# Altium PCB 示波器上层板最终实物版图.PcbDoc
Units mil, origin at the board's own origin, x right, y up, seen from the top; angles counter-clockwise.
Board outline 17265 x 9440 mil, 2 copper layers (Top Layer, Bottom Layer); 24 components, 122 nets, 277 pads, 0 vias.
Unrouted connection lines stored in the file: 22.
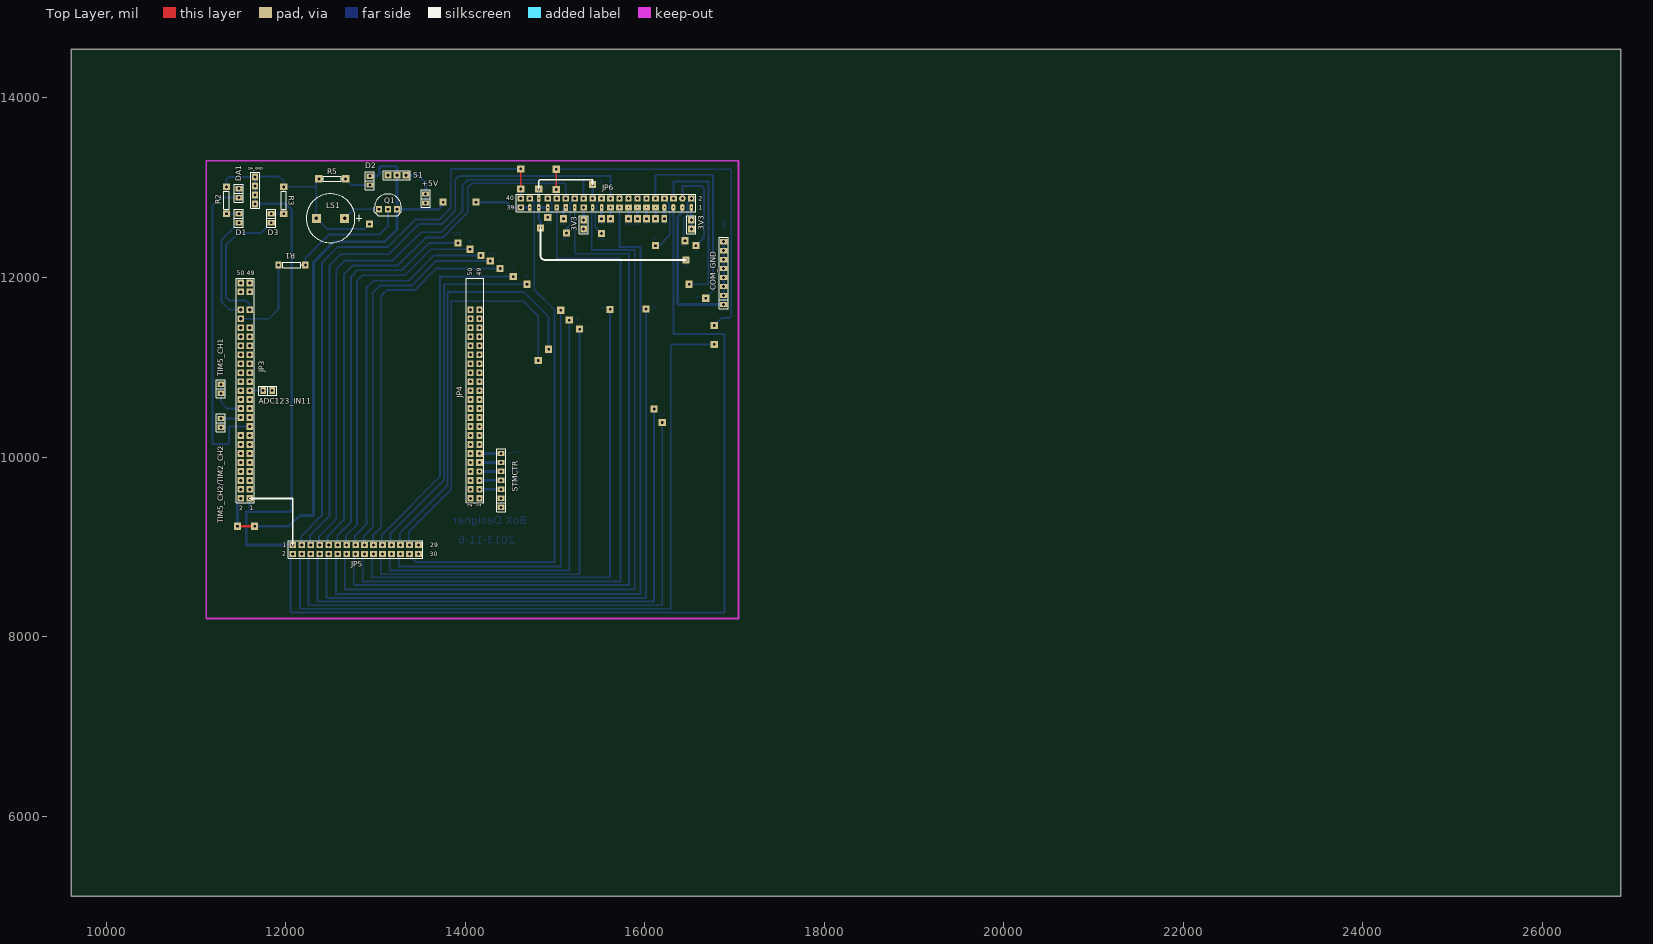
[diagram p0: Top Layer view]
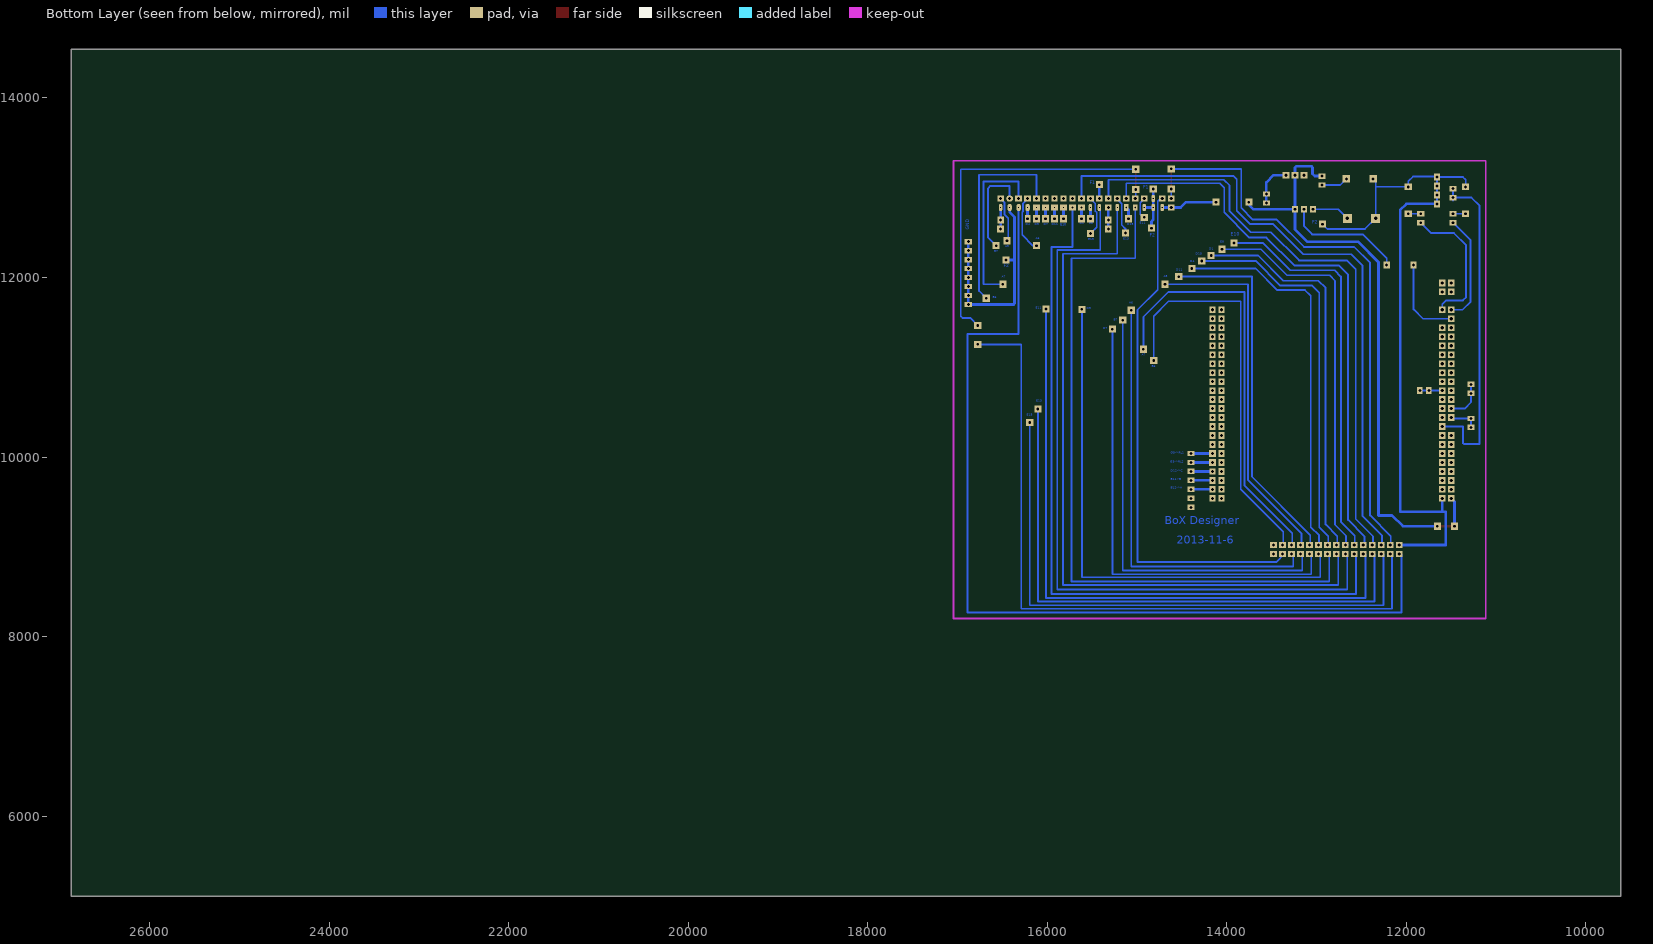
[diagram p1: Bottom Layer view, seen from below]

## Layer stack, top to bottom
Top Layer: signal copper 1.4
Dielectric: dielectric 12.6, FR-4, Dk 4.8
Bottom Layer: signal copper 1.4

## Board outline
9610,14545 9610,5105 26875,5105 26875,14540

## Design rules (kind name [scope] priority, off if disabled: settings)
Clearance [All] p1: gap=10
PolygonConnect [All] p1: connectstyle=Relief reliefconductorwidth=10 reliefentries=4 polygonreliefangle="90 Angle"
RoutingVias [All] p1: holewidth=28 width=50 viastyle="Through Hole" minholewidth=28 minwidth=50 maxholewidth=28 maxwidth=50
SilkscreenOverComponentPads [All] p1: minsilkscreentomaskgap=10
SolderMaskExpansion [All] p1: expansion=4
TestPointUsage [All] p1: valid=0 allowmultiple=FALSE
Testpoint [All] p1: side=15 testpointundercomponent=TRUE minsize=40 maxsize=100 preferedsize=60 minholesize=0 maxholesize=40 preferedholesize=32 testpointgrid=1 style=1023 order=0123456789
Width [All] p1: maxlimit=30 minlimit=10 preferedwidth=10 toplayer_prefwidth=20 bottomlayer_prefwidth=20 minimp=50.000000 maximp=50.000000 favimp=50.000000
23 further rules are at their usual default settings.

## Components (designator, comment, footprint, x,y, rotation, side; value= is the part's Value field where it differs from the comment)
3V3 "Comment" HDR1X2#1 15320,12540 r90 top
3V3 "Comment" HDR1X2#2 16520,12540 r90 top
+5V "" SIP2 13560,12880 r90 top
ADC123_IN11 "" SIP2 11800,10740 r180 top
COM_GND "" SIP8 16880,11700 r90 top
D1 "LED" SIP2 11480,12660 r270 top
D2 "LED" SIP2 12940,13080 r90 top
D3 "LED" SIP2 11840,12660 r270 top
DA1 "" SIP2 11480,12940 r90 top (schematic designator DAC_OUT1)
DA_GND "" HDR1X4 11660,12820 r90 top (schematic designator DAC2_GND)
JP3 "HEADER 25X2" HDR2X25#1 11600,9540 r90 top
JP4 "HEADER 25X2" HDR2X25#2 14160,9540 r90 top
JP5 "HEADER 15X2" HDR2X15 12080,9020 r0 top
JP6 "LCD" HDR2X20 16520,12780 r180 top
LS1 "SPEAKER" BELL 12500,12660 r0 top
Q1 "NPN" TL431 13140,12900 r0 top
R1 "Res2" AXIAL0.3 12070,12140 r0 top
R2 "Res2" AXIAL0.3 11340,12860 r270 top
R3 "Res2" AXIAL0.3 11980,12860 r270 top
R5 "Res2" AXIAL-0.3 12520,13100 r0 top
S1 "SW-SPST" HDR1X3 13340,13140 r180 top
STMCTR "" SIP7 14400,9440 r90 top
TIM5_CH1 "" SIP2 11280,10760 r90 top
TIM5_CH2/TIM2_CH2 "" SIP2 11280,10380 r90 top

## Footprints (in the part's own frame and the unit in brackets; to place one, negate y for a bottom-side part, rotate by r counter-clockwise, add the part's x,y. Pads: shape width x height; smd on the part's side, far side on the other; paste and mask are expansions set on the pad)
AXIAL0.3 [mil]
  rect 70x80 hole 32: 1(-150,0) 2(150,0)
  silkscreen extent -109,-30 109,30
AXIAL-0.3 [mil] "Resistor; 2 Leads"
  rect 80x80 hole 33.46: 1(-150,0) 2(150,0)
  silkscreen extent -109,-30 109,30
BELL [mil]
  rect 100x100 hole 40: 1(158,0) 2(-158,0)
  silkscreen extent -271,-272 348,272
HDR1X2#1 [mil] "Connector; Header; 2 Position"
  rect 75x70 hole 35.43: 1(0,0) 2(100,0)
  silkscreen extent -50,-50 150,50
HDR1X2#2 [mil] "Connector; Header; 2 Position"
  rect 80x80 hole 35.43: 1(0,0)
  rect 75x70 hole 35.43: 2(100,0)
  silkscreen extent -50,-50 150,50
HDR1X3 [mil] "Connector; Header; 3 Position"
  rect 75x70 hole 35.43: 1(0,0) 2(100,0) 3(200,0)
  silkscreen extent -50,-50 250,50
HDR1X4 [mil] "Connector; Header; 4 Position"
  rect 75x70 hole 35.43: 1(0,0) 2(100,0) 3(200,0) 4(300,0)
  silkscreen extent -50,-50 350,50
HDR2X15 [mil] "Connector; Header; 15x2 Position"
  rect 75x70 hole 35.43: 1(0,0) 2(0,-100) 3(100,0) 4(100,-100) 5(200,0) 6(200,-100) 7(300,0) 8(300,-100) 9(400,0) 10(400,-100) 11(500,0) 12(500,-100) 13(600,0) 14(600,-100) 15(700,0) 16(700,-100) 17(800,0) 18(800,-100) 19(900,0) 20(900,-100) 21(1000,0) 22(1000,-100) 23(1100,0) 24(1100,-100) 25(1200,0) 26(1200,-100) 27(1300,0) 28(1300,-100) 29(1400,0) 30(1400,-100)
  silkscreen extent -50,-150 1450,50
HDR2X20 [mil] "Connector; Header; 20x2 Position"
  oval 40x80 hole 10: 1(0,0) 21(1000,0) 23(1100,0) 27(1300,0) 33(1600,0) 35(1700,0) 36(1700,-100) 37(1800,0)
  rect 75x70 hole 35.43: 2(0,-100) 6(200,-100) 8(300,-100) 10(400,-100) 20(900,-100) 22(1000,-100) 24(1100,-100) 25(1200,0) 26(1200,-100) 28(1300,-100) 30(1400,-100) 32(1500,-100) 34(1600,-100) 38(1800,-100) 39(1900,0) 40(1900,-100)
  oval 50x80 hole 10: 3(100,0) 5(200,0)
  oval 75x70 hole 35.43: 4(100,-100)
  oval 50x80 hole 10.43: 7(300,0)
  rect 75x70 hole 10: 9(400,0) 11(500,0) 13(600,0) 15(700,0)
  oval 0x80 all layers, no hole: 12(500,-100) 14(600,-100) 16(700,-100) 18(800,-100)
  rect 75x70 hole 20: 17(800,0)
  rect 80x70 hole 20: 19(900,0)
  rect 50x80 hole 20: 29(1400,0)
  rect 50x70 hole 20: 31(1500,0)
  silkscreen extent -50,-150 1950,50
HDR2X25#1 [mil] "Connector; Header; 25x2 Position"
  rect 75x70 hole 35.43: 1(0,0) 2(0,100) 3(100,0) 4(100,100) 5(200,0) 6(200,100) 7(300,0) 8(300,100) 9(400,0) 10(400,100) 11(500,0) 12(500,100) 13(600,0) 14(600,100) 15(700,0) 16(700,100) 17(800,0) 19(900,0) 20(900,100) 21(1000,0) 22(1000,100) 23(1100,0) 24(1100,100) 25(1200,0) 26(1200,100) 27(1300,0) 28(1300,100) 29(1400,0) 30(1400,100) 31(1500,0) 32(1500,100) 33(1600,0) 34(1600,100) 35(1700,0) 36(1700,100) 37(1800,0) 38(1800,100) 39(1900,0) 40(1900,100) 42(2000,100) 43(2100,0) 44(2100,100) 47(2300,0) 48(2300,100) 49(2400,0) 50(2400,100)
  round 0 all layers, no hole: 18(800,100)
  oval 0x80 all layers, no hole: 41(2000,0) 46(2200,100)
  rect 0x70 all layers, no hole: 45(2200,0)
  silkscreen extent -50,-50 2450,150
HDR2X25#2 [mil] "Connector; Header; 25x2 Position"
  rect 75x70 hole 35.43: 1(0,0) 2(0,100) 3(100,0) 4(100,100) 5(200,0) 6(200,100) 8(300,100) 10(400,100) 12(500,100) 13(600,0) 14(600,100) 15(700,0) 16(700,100) 17(800,0) 18(800,100) 19(900,0) 20(900,100) 21(1000,0) 22(1000,100) 23(1100,0) 24(1100,100) 25(1200,0) 26(1200,100) 27(1300,0) 28(1300,100) 29(1400,0) 30(1400,100) 31(1500,0) 32(1500,100) 33(1600,0) 34(1600,100) 35(1700,0) 36(1700,100) 37(1800,0) 38(1800,100) 39(1900,0) 40(1900,100) 41(2000,0) 42(2000,100) 43(2100,0) 44(2100,100)
  round 0 all layers, no hole: 7(300,0) 47(2300,0) 48(2300,100) 49(2400,0) 50(2400,100)
  rect 80x80 hole 35.43: 9(400,0) 11(500,0)
  oval 0x80 all layers, no hole: 45(2200,0) 46(2200,100)
  silkscreen extent -50,-50 2450,150
SIP2 [mil]
  rect 60x80 hole 32: 1(-50,0) 2(50,0)
  silkscreen extent -100,-50 100,50
SIP7 [mil]
  rect 60x80 hole 32: 1(0,0) 2(100,0) 3(200,0) 4(300,0) 5(400,0) 6(500,0) 7(600,0)
  silkscreen extent -50,-50 650,50
SIP8 [mil]
  rect 60x80 hole 32: 1(0,0) 2(100,0) 3(200,0) 4(300,0) 5(400,0) 6(500,0) 7(600,0) 8(700,0)
  silkscreen extent -50,-50 750,50
TL431 [mil]
  rect 70x70 hole 31.5: 1(-100,-140) 2(0,-140) 3(100,-140)
  silkscreen extent -150,-210 150,30

## Part data
+5V: library part "HEADER 3"
ADC123_IN11 DA_GND TIM5_CH1 TIM5_CH2/TIM2_CH2: library part CON2, "Connector"
COM_GND: library part CON8, "Connector"
DA1: library part CON4, "Connector"
JP6: library part "HEADER 20X2"
Q1: "NPN Transistor"
R1 R2 R3 R5: "Resistor"
STMCTR: library part CON7, "Connector"

## Free pads (board coordinates)
  rect 80x80 hole 30: 0(11465,9230) 0(14120,12840) 1(11655,9230) 1(13755,12840) 2(16680,11770) 3(14815,11075) 4(16495,11925) 5(14930,11200) 6(12935,12595) 7(14840,12550) 8(16105,10535) 9(16460,12195) 10(16195,10385) 12(16775,11255) 14(14620,13210) 15(14620,12985) 16(13920,12385) 17(14055,12315) 18(14175,12245) 19(14280,12185) 20(14390,12100) 21(15820,12655) 22(15520,12655) 23(15620,12655) 24(15095,12655) 26(14535,12010) 27(15920,12655) 28(14690,11925) 29(16450,12410) 30(15065,11635) 31(16120,12355) 32(15160,11525) 33(16570,12355) 34(15275,11425) 35(16020,12655) 36(15615,11645) 37(16120,12655) 38(16015,11650) 39(14920,12670) 41(15130,12495) 42(15520,12490) 43(16775,11465) 44(15015,13205) 45(15015,12980) 46(15420,13035) 47(14820,12985)
  rect 70x70 hole 30: 0(15720,12880) 1(15820,12880) 2(15920,12880) 3(16020,12880) 4(14160,9840)
  rect 60x80 hole 30: 25(16220,12655)

## Nets (pads, with @x,y where several pads share a name; then routed paths per layer and width w, separated by ;. In a path a pad name is that pad's centre, name@x,y a point inside that pad or via, vN(x,y) a via of type N, cw(c..) or ccw(c..) an arc to the next point about the centre after c; other vN are vias at no path point)
3V3: 3V3.1 3V3.2 JP6.1 JP6.25 | length 500
  Bottom Layer w30: 3V3.1@15320,12540 15320,12640 JP6.25 ; 3V3.1@16520,12520 16520,12620 JP6.1
4051A: 
4051B: JP4.8
4051C: 
+5V: +5V.1 +5V.2 S1.1 | length 483.1
  Bottom Layer w30: S1.1 13480,13140 13560,13060 +5V.2 +5V.1
+5VDD: D2.2 JP3.2 JP6.37 JP6.39 pad.0@11465,9230 pad.0@14120,12840 pad.1@11655,9230 pad.1@13755,12840 Q1.3 S1.2 | length 7393.7
  Top Layer w30: pad.0@11465,9230 pad.1@11655,9230
  Bottom Layer w30: pad.0@11465,9230 11465,9505 JP3.2 ; pad.1@11655,9230 12040,9230 12160,9350 12310,9350 12310,12170 12540,12400 13105,12400 13240,12535 Q1.3 ; D2.2 13020,13130 13045,13155 13045,13225 13060,13240 13225,13240 13240,13225 S1.2 Q1.3 ; pad.1@13755,12840 13755,12810 13705,12760 Q1.3 ; pad.0@14120,12840 14455,12840 14515,12780 JP6.39 JP6.37
A0: JP3.22 TIM5_CH1.1 TIM5_CH1.2 | length 449
  Bottom Layer w20: TIM5_CH1.2 TIM5_CH1.1 11280,10610 11350,10540 JP3.22
A1: JP3.20 TIM5_CH2/TIM2_CH2.1 TIM5_CH2/TIM2_CH2.2 | length 324.1
  Bottom Layer w20: TIM5_CH2/TIM2_CH2.1 TIM5_CH2/TIM2_CH2.2 11490,10430 JP3.20
A2: JP3.19
A3: JP3.18
A4: DA1.1 DA1.2 JP3.17 | length 3726.4
  Bottom Layer w20: 11480,12855 DA1.1 ; DA1.2 DA1.1 ; JP3.17 11370,10340 11370,10155 11360,10145 11185,10145 11185,12800 11275,12890 DA1.1
A5: JP5.23 JP6.2 pad.28 pad.29 | length 4592
  Bottom Layer w20: JP5.23 13170,9030 13170,9150 13765,9745 13765,11925 pad.28 ; pad.29 16435,12425 16435,12660 16477.5,12702.5 16477.5,12837.5 JP6.2
A6: JP5.26 JP6.8 pad.30 pad.31 | length 5439.6
  Bottom Layer w20: JP5.26@13260,8920 13260,8780 15065,8780 pad.30 ; pad.31 16160,12355 16280,12475 16280,12725 16270,12735 16270,12825 16220,12875 JP6.8
A7: JP5.25 JP6.6 pad.4@16495,11925 pad.5 | length 6584.7
  Bottom Layer w20: JP5.25 13272.5,9027.5 13272.5,9152.5 13805,9685 13805,11840 14650,11840 14930,11560 pad.5 ; JP6.6 16320,13070 16710,13070 16710,11925 pad.4@16495,11925
A8: JP4.19
A9: JP4.20
A10: JP4.21
A11: JP4.22
A12: JP4.23
A13: JP4.24
A14: JP4.25
A15: JP4.26
B0: JP3.14
B1: JP3.13
B3: JP4.40
B4: JP4.41
B5: JP4.42
B6: JP5.27 JP6.10 pad.2@16680,11770 pad.3@14815,11075 | length 6760.3
  Bottom Layer w20: JP5.27 13372.5,9027.5 13372.5,9167.5 13845,9640 13845,11735 14650,11735 14815,11570 pad.3@14815,11075 ; JP6.10 16120,13145 16760,13145 16760,11850 pad.2@16680,11770
B7: JP5.24 JP6.4 pad.32 pad.33 | length 6042.6
  Bottom Layer w20: JP5.24@13160,8920 13160,8735 15160,8735 pad.32 ; JP6.4 16420,13020 16635,13020 16660,12995 16660,12445 pad.33
B8: JP4.43
B9: JP4.44
B10: JP3.5
B11: JP3.4
B12: JP4.3 STMCTR.3 | length 240
  Bottom Layer w30: JP4.3 STMCTR.3
B13: JP4.4
B14: JP4.5 STMCTR.4 | length 240
  Bottom Layer w30: JP4.5 STMCTR.4
B15: JP4.6
C0: JP3.26
C1: ADC123_IN11.1 ADC123_IN11.2 JP3.25 | length 250
  Bottom Layer w20: JP3.25 ADC123_IN11.2 ADC123_IN11.1
C2: JP5.30
C3: JP3.24
C4: JP3.16
C5: JP3.15
C6: JP4.15
C7: JP4.16
C8: JP4.17
C9: JP4.18
C10: JP4.27
C11: JP4.28
C12: JP4.29
C13: JP3.40
C14: JP3.39
C15: JP3.38
D0: JP5.16 JP6.27 | length 8220
  Bottom Layer w20: JP5.16@12760,8920 12760,8575 15825,8575 15825,12265 15220,12265 JP6.27
D1: JP5.15 JP6.19 pad.18 pad.23 | length 4479.2
  Bottom Layer w20: JP5.15@12755,9025 JP5.15@12760,9020 ; JP5.15 12770,9030 12770,9120 12900,9250 12900,11885 12980,11965 13370,11965 13650,12245 pad.18
  Bottom Layer w30: pad.23 JP6.19
D2: JP4.30
D3: JP4.31
D4: JP5.19 JP6.7 pad.20 pad.25 | length 4399.8
  Bottom Layer w20: JP5.19@12955,9025 JP5.19@12960,9020 ; JP5.19 12972.5,9027.5 12972.5,9127.5 13065,9220 13065,11795 13130,11860 13440,11860 13680,12100 pad.20
  Bottom Layer w30: pad.25 JP6.7
D5: JP5.20 JP6.9 pad.36 pad.37 | length 6025
  Bottom Layer w20: JP5.20@12960,8920 12960,8660 15615,8660 pad.36
  Bottom Layer w30: pad.37 JP6.9
D6: JP4.32
D7: JP5.22 JP6.11 pad.34 pad.35 | length 5295
  Bottom Layer w20: JP5.22@13060,8920 13060,8695 15275,8695 pad.34
  Bottom Layer w30: pad.35 JP6.11
D8: JP5.5 JP6.20 | length 7215.4
  Bottom Layer w20: JP5.5@12255,9025 JP5.5@12260,9020 ; JP5.5 12272.5,9027.5 12272.5,9127.5 12490,9345 12490,12135 12615,12260 13150,12260 13485,12595 13740,12595 13890,12745 13890,13100 13895,13100 13925,13130 15620,13130 JP6.20
D9: JP5.4 JP6.32 pad.12 pad.43 pad.44 pad.45 | length 12315.6
  Top Layer w20: pad.45 pad.44
  Bottom Layer w20: JP5.4@12160,8920 12160,8310 16290,8310 16290,11255 pad.12 ; pad.45 15015,12885 JP6.32 ; pad.44 16965,13205 16965,11570 16945,11550 16860,11550 pad.43
D10: JP5.3 JP6.40 pad.14 pad.15 | length 6489.2
  Top Layer w20: pad.15 pad.14
  Bottom Layer w20: JP5.3@12155,9025 JP5.3@12160,9020 ; JP5.3 12175,9025 12175,9120 12405,9350 12405,12165 12580,12340 13140,12340 13445,12645 13710,12645 ; 13715,12650 13710,12645 ; JP6.40 pad.15 ; pad.14 13840,13210 13840,12775 13710,12645
D11: JP5.21 JP6.13 pad.26 pad.27 | length 4203.4
  Bottom Layer w20: JP5.21 13070,9030 13070,9130 13720,9780 13720,12010 pad.26
  Bottom Layer w30: pad.27 JP6.13
D12: JP4.7 pad.4@14160,9840 STMCTR.5 | length 240
  Bottom Layer w30: JP4.7 STMCTR.5
D13: JP5.28 JP6.38 | length 5847.9
  Bottom Layer w20: JP5.28@13360,8920 13450,8830 14995,8830 14995,11640 14770,11865 14770,12850 14740,12880 JP6.38
D14: JP5.18 JP6.31 | length 8050
  Bottom Layer w20: JP5.18@12860,8920 12860,8615 15730,8615 15730,12215 15020,12215 JP6.31
D15: JP5.17 JP6.29 pad.19 pad.24 | length 4490.4
  Bottom Layer w20: JP5.17@12855,9025 JP5.17@12860,9020 ; JP5.17 12870,9030 12870,9120 12970,9220 12970,11830 13050,11910 13405,11910 13680,12185 pad.19 ; pad.24 pad.24@15120,12680
  Bottom Layer w30: pad.24 15095,12755 JP6.29
E0: JP4.45
E1: JP5.2 JP6.5 | length 10567.1
  Bottom Layer w20: JP5.2@12060,8920 12055,8915 12055,8270 16890,8270 16890,11370 16320,11370 JP6.5
E2: JP4.46
E3: D1.2 JP3.44 | length 1213.1
  Bottom Layer w20: D1.2 11285,12415 11285,11730 11375,11640 JP3.44
E4: D3.2 JP3.43 | length 1546.7
  Bottom Layer w20: JP3.43 11600,11700 11555,11745 11370,11745 11335,11780 11335,12360 11470,12495 11725,12495 D3.2
E5: JP3.42 R1.1 | length 958.5
  Bottom Layer w20: JP3.42 11815,11540 11920,11645 R1.1
E6: JP3.41
E7: JP5.14 JP6.23 | length 8364.1
  Bottom Layer w20: JP5.14@12660,8920 12660,8525 15890,8525 15890,12305 15410,12305 15410,12770 JP6.23
E8: JP5.13 JP6.21 pad.17 pad.22 | length 4535.9
  Bottom Layer w20: JP5.13@12655,9025 JP5.13@12660,9020 ; JP5.13 12672.5,9027.5 12672.5,9122.5 12795,9245 12795,11965 12855,12025 13330,12025 13620,12315 pad.17
  Bottom Layer w30: pad.22 JP6.21
E9: JP5.12 JP6.17 | length 8380
  Bottom Layer w20: JP5.12@12560,8920 12560,8475 15955,8475 15955,12340 15720,12340 JP6.17
E10: JP5.11 JP6.15 pad.16 pad.21 | length 4533.7
  Bottom Layer w20: JP5.11@12555,9025 JP5.11@12560,9020 ; JP5.11 12575,9025 12575,9125 12730,9280 12730,12010 12800,12080 13295,12080 13600,12385 pad.16
  Bottom Layer w30: pad.21 JP6.15
E11: JP5.10 JP6.34 pad.38 pad.39 | length 7525.2
  Bottom Layer w20: JP5.10@12460,8920 12455,8915 12455,8430 16015,8430 pad.38 ; pad.39 14930,12670 14965,12705 14965,12835 JP6.34
E12: JP5.9 JP6.30 | length 6321.4
  Bottom Layer w20: JP5.9@12455,9025 JP5.9@12460,9020 ; JP5.9 12467.5,9032.5 12467.5,9117.5 12650,9300 12650,12030 12755,12135 13250,12135 13560,12445 13750,12445 14030,12725 14030,13000 14080,13050 15120,13050 JP6.30
E13: JP5.8 JP6.28 pad.8 pad.41 | length 6849.4
  Bottom Layer w20: JP5.8@12360,8920 12355,8915 12355,8390 16105,8390 pad.8 ; pad.41 15130,12545 15170,12585 15170,12821.72 15220,12871.72 JP6.28
E14: JP5.7 JP6.26 | length 6706.1
  Bottom Layer w20: JP5.7@12355,9025 JP5.7@12360,9020 ; JP5.7 12372.5,9027.5 12372.5,9117.5 12565,9310 12565,12090 12665,12190 13195,12190 13510,12505 13735,12505 13970,12740 13970,13025 14035,13090 15320,13090 JP6.26
E15: JP5.6 JP6.22 pad.10 pad.42 | length 6995.1
  Bottom Layer w20: JP5.6@12260,8920 12255,8915 12255,8350 16195,8350 pad.10 ; pad.42 15450,12560 15450,12725 15465,12740 15465,12824.22 15520,12879.22 JP6.22
F0: JP3.37
F1: JP3.36
F2: JP3.35
F3: JP3.34
F4: JP3.33
F5: JP3.32
F6: JP3.31
F7: JP3.30
F8: JP3.29
F9: JP3.28
F10: JP3.27
F11: JP3.12
F12: JP3.11
F13: JP3.10
F14: JP3.9
F15: JP3.8
G0: JP3.7
G4: JP4.9 STMCTR.6 | length 240
  Bottom Layer w30: JP4.9 STMCTR.6
G5: JP4.11 STMCTR.7 | length 240
  Bottom Layer w30: JP4.11 STMCTR.7
G6: JP4.12
G7: JP4.13
G8: JP4.14
G9: JP4.33
G10: JP4.34
G11: JP4.35
G12: JP4.36
G13: JP4.37
G14: JP4.38
G15: JP4.39
GND: COM_GND.1 COM_GND.2 COM_GND.3 COM_GND.4 COM_GND.5 COM_GND.6 COM_GND.7 COM_GND.8 DA_GND.1 DA_GND.2 DA_GND.3 DA_GND.4 JP3.1 JP5.1 JP6.3 JP6.24 JP6.33 JP6.35 JP6.36 LS1.2 pad.6 pad.7 pad.9 pad.46 pad.47 R2.1 R3.1 R5.1 | length 11084.2
  Bottom Layer w20: R2.1 11340,13090 11370,13120 DA_GND.4 ; DA_GND.1 DA_GND.2 DA_GND.3 DA_GND.4 ; R5.1 12342,13072 12342,13005 ; pad.6 12880,12540 12462,12540 LS1.2 12342,13005 ; DA_GND.4 11665,13125 11925,13125 11980,13070 R3.1 12337,13010 12342,13005
  Bottom Layer w30: JP3.1 11600,9390 ; DA_GND.1 12000,12820 12070,12750 12070,9390 11600,9390 ; JP5.1@12060,9020 11560,9020 11560,9390 11600,9390 ; pad.7@14820,12570 pad.7 14840,12625 14820,12645 JP6.35 ; pad.47 JP6.36 JP6.35 ; JP6.33 JP6.35 ; JP6.24 pad.46 ; JP6.3 16420,12730 16365,12675 16365,12190 ; pad.9 16370,12195 16365,12190 ; COM_GND.1@16865,11685 COM_GND.1 ; COM_GND.8 COM_GND.7 COM_GND.6 COM_GND.5 COM_GND.4 COM_GND.3 COM_GND.2 COM_GND.1 ; 16365,12190 16365,11710 16375,11700 COM_GND.1
NetD1_K: D1.1 R2.2 | length 140
  Bottom Layer w20: R2.2 D1.1
NetD2_K: D2.1 R5.2 | length 299
  Bottom Layer w20: R5.2 12740,13030 D2.1
NetD3_K: D3.1 R3.2 | length 140
  Bottom Layer w20: D3.1 R3.2
NetD4_K: 
NetLS1_1: LS1.1 Q1.1 | length 423.4
  Bottom Layer w20: LS1.1 12758,12760 Q1.1
NetQ1_2: Q1.2 R1.2 | length 1332
  Bottom Layer w20: R1.2 12220,12215 12485,12480 13050,12480 13140,12570 Q1.2
RST: JP3.3
pads on no net: JP3.6 JP3.21 JP3.23 JP3.45 JP3.46 JP3.47 JP3.48 JP3.49 JP3.50 JP4.1 JP4.2 JP4.10 JP4.47 JP4.48 JP4.49 JP4.50 JP5.29 JP6.12 JP6.14 JP6.16 JP6.18 S1.3 STMCTR.1 STMCTR.2

## Keep-outs
Keep-Out Layer:
  lines w20: 11115,8200 11115,13300 17045,13300 17045,8200 11115,8200

## Other copper
Bottom Layer:
  text "F1" at 15530,13020 h60
  text "F1" at 14930,12970 h60
  text "E11" at 14970,12585 h40
  text "F2" at 13050,12580 h60
  text "E8" at 15535,12580 h40
  text "D1" at 15640,12580 h40
  text "D15" at 15110,12570 h40
  text "D11" at 15950,12570 h40
  text "D7" at 16040,12570 h40
  text "D5" at 16140,12570 h40
  text "D4" at 16240,12570 h40
  text "E10" at 15855,12565 h50
  text "GND" at 16855,12530 h60 r270
  text "E10" at 13955,12450 h60
  text "F2" at 14860,12440 h60
  text "A6" at 16130,12415 h40
  text "E13" at 15155,12410 h40
  text "E15" at 15545,12405 h40
  text "E8" at 14075,12375 h40
  text "A5" at 16470,12325 h40
  text "D1" at 14195,12300 h40
  text "B7" at 16590,12270 h40
  text "D15" at 14345,12245 h40
  text "D4" at 14405,12160 h40
  text "F2" at 16485,12100 h60
  text "D11" at 14565,12065 h40
  text "A5" at 14705,11990 h40
  text "A7" at 16510,11985 h40
  text "B6" at 16610,11760 h40
  text "A6" at 15085,11695 h40
  text "E11" at 16130,11640 h40
  text "D5" at 15560,11635 h40
  text "B7" at 15260,11510 h40
  text "D7" at 15375,11410 h40
  text "A7" at 14950,11115 h40
  text "B6" at 14835,10990 h40
  text "E13" at 16125,10605 h40
  text "E15" at 16230,10450 h40
  text "G5->RL1" at 14625,10025 h40
  text "G3->RL2" at 14630,9925 h40
  text "D12->C" at 14625,9825 h40
  text "B14>B" at 14625,9730 h40
  text "B12->A" at 14625,9635 h40
  text "BoX Designer" at 14690,9220 h150
  text "2013-11-6" at 14560,9000 h150

## Silkscreen, mask and mechanical layers (free items; w line width, h text height)
Top Overlay:
  lines w20: 11600,9540 12080,9540 12080,9020 ; 14820,12985 14820,13075 14835,13090 15415,13090 15420,13085 15420,13035 ; 14840,12550 14840,12245 ccw(c14890,12245) 14890,12195 16460,12195

## Text inside footprints (layer, text, board x,y; h text height)
JP3: Top Overlay "50" at 11455,12025 h50; Top Overlay "49" at 11565,12025 h50; Top Overlay "1" at 11600,9410 h50; Top Overlay "2" at 11485,9410 h50
JP4: Top Overlay "50" at 14080,12020 h50 r90; Top Overlay "49" at 14180,12020 h50 r90; Top Overlay "1" at 14180,9440 h50 r90; Top Overlay "2" at 14080,9440 h50 r90
JP5: Top Overlay "30" at 13605,8945 h50 r180; Top Overlay "29" at 13610,8995 h50; Top Overlay "2" at 11960,8900 h50; Top Overlay "1" at 11970,8995 h50
JP6: Top Overlay "39" at 14465,12755 h50; Top Overlay "40" at 14460,12860 h50; Top Overlay "2" at 16600,12855 h50; Top Overlay "1" at 16605,12755 h50